# EAGLE board Spectacular Krunk (EAGLE 9.7.0)

Size 140.74 x 85.74 mm. Coordinates in mm from the lower left corner, seen from the top.
Outline: 0,0 140.74,0 140.74,85.74 0,85.74 0,0
Copper layers (1*16): Top 0.035mm / dielectric 1.5mm / Bottom 0.035mm
Design rules "default": minimum track width 6mil, minimum drill 0.35mm, track to track 6mil, track to pad 6mil, pad to pad 6mil, via to via 6mil, smd to smd 6mil, copper to edge 40mil, drill to drill 6mil, minimum pad ring 10mil, minimum via ring 8mil, stop-mask expansion 4mil, vias tented up to drill 0mil, thermal gap 10mil

## Footprints (pad centres in the part's own frame; a part is rotated, then mirrored left to right if it is on the bottom)
LEDRD254W60D565H860B = drill 0.981 pad 1.581: 1 -1.27,0; 2 1.27,0
GL5528 = drill 0.8 pad 1.4: 1 -1.702,0; 2 1.702,0
RESAD1016W63L850D250B = drill 0.83 pad 1.43: 1 -5.08,0; 2 5.08,0
SG90 = drill 1.016 long: 1 -2.54,0; 2 0,0; 3 2.54,0
ARDUINO-UNO-R3-SHIELD = drill 1.016 pad 1.88: 3.3V 24.13,-2.54; 5V 24.13,0; A0 24.13,12.7; A1 24.13,15.24; A2 24.13,17.78; A3 24.13,20.32; A4 24.13,22.86; A5 24.13,25.4; AREF -24.13,-13.97; D2 -24.13,20.32; D3 -24.13,17.78; D4 -24.13,15.24; D5 -24.13,12.7; D6 -24.13,10.16; D7 -24.13,7.62; D8 -24.13,3.81; D9 -24.13,1.27; D10 -24.13,-1.27; D11 -24.13,-3.81; D12 -24.13,-6.35; D13 -24.13,-8.89; GND@0 24.13,2.54; GND@1 24.13,5.08; GND@2 -24.13,-11.43; IOREF 24.13,-7.62; NC 24.13,-10.16; RES 24.13,-5.08; RX -24.13,25.4; SCL -24.13,-19.05; SDA -24.13,-16.51; TX -24.13,22.86; VIN 24.13,7.62
TO92 = drill 0.813 octagon: 1 -1.27,0; 2 0,1.905; 3 1.27,0

## Placement (x,y rotation side)
D2  RED  [LEDRD254W60D565H860B]  37.83,77.83 180 top
R2  PHOTOCELL_GL5528  [GL5528]  51.6,78.12 0 top
R3  100  [RESAD1016W63L850D250B]  40.62,68.25 90 top
R4  3k  [RESAD1016W63L850D250B]  47.06,68.11 90 top
SERVO2  SERVOSG90  [SG90]  133.75,24.62 0 top
U3  ARDUINO-UNO-R3-SHIELD  [ARDUINO-UNO-R3-SHIELD]  47.88,29.84 270 top
U4  TMP36GT9Z_TO92  [TO92]  109.99,33.07 0 top

## Library data of the parts
D2 = Tinkercad; CATEGORY: Opto-Electronic; SUB-CATEGORY: LED; VALUE: LED_RED
R2-R4 SERVO2 U3 U4 = Tinkercad

## Nets
D2_A: D2.1 R3.2
U3_5V: R2.2 SERVO2.2 U3.5V U4.3
U3_A0: R2.1 R4.2 U3.A0
U3_A1: U3.A1 U4.2
U3_D3: SERVO2.3 U3.D3
U3_D13: R3.1 U3.D13
U3_GND: D2.2 R4.1 SERVO2.1 U3.GND@0 U3.GND@1 U3.GND@2 U4.1

## Tracks (layer width: path | path; a pad name or v marks a point on that pad's centre or on a via)
D2_A  (1 unrouted)
U3_5V  (3 unrouted)
U3_A0  (2 unrouted)
U3_A1  (1 unrouted)
U3_D3  (1 unrouted)
U3_D13  (1 unrouted)
U3_GND  (6 unrouted)